# Altium PCB Maketa.PcbDoc
Units mil, origin at the board's own origin, x right, y up, seen from the top; angles counter-clockwise.
Board outline 6000 x 4000 mil, 2 copper layers (Top Layer, Bottom Layer); 20 components, 0 nets, 51 pads, 0 vias.
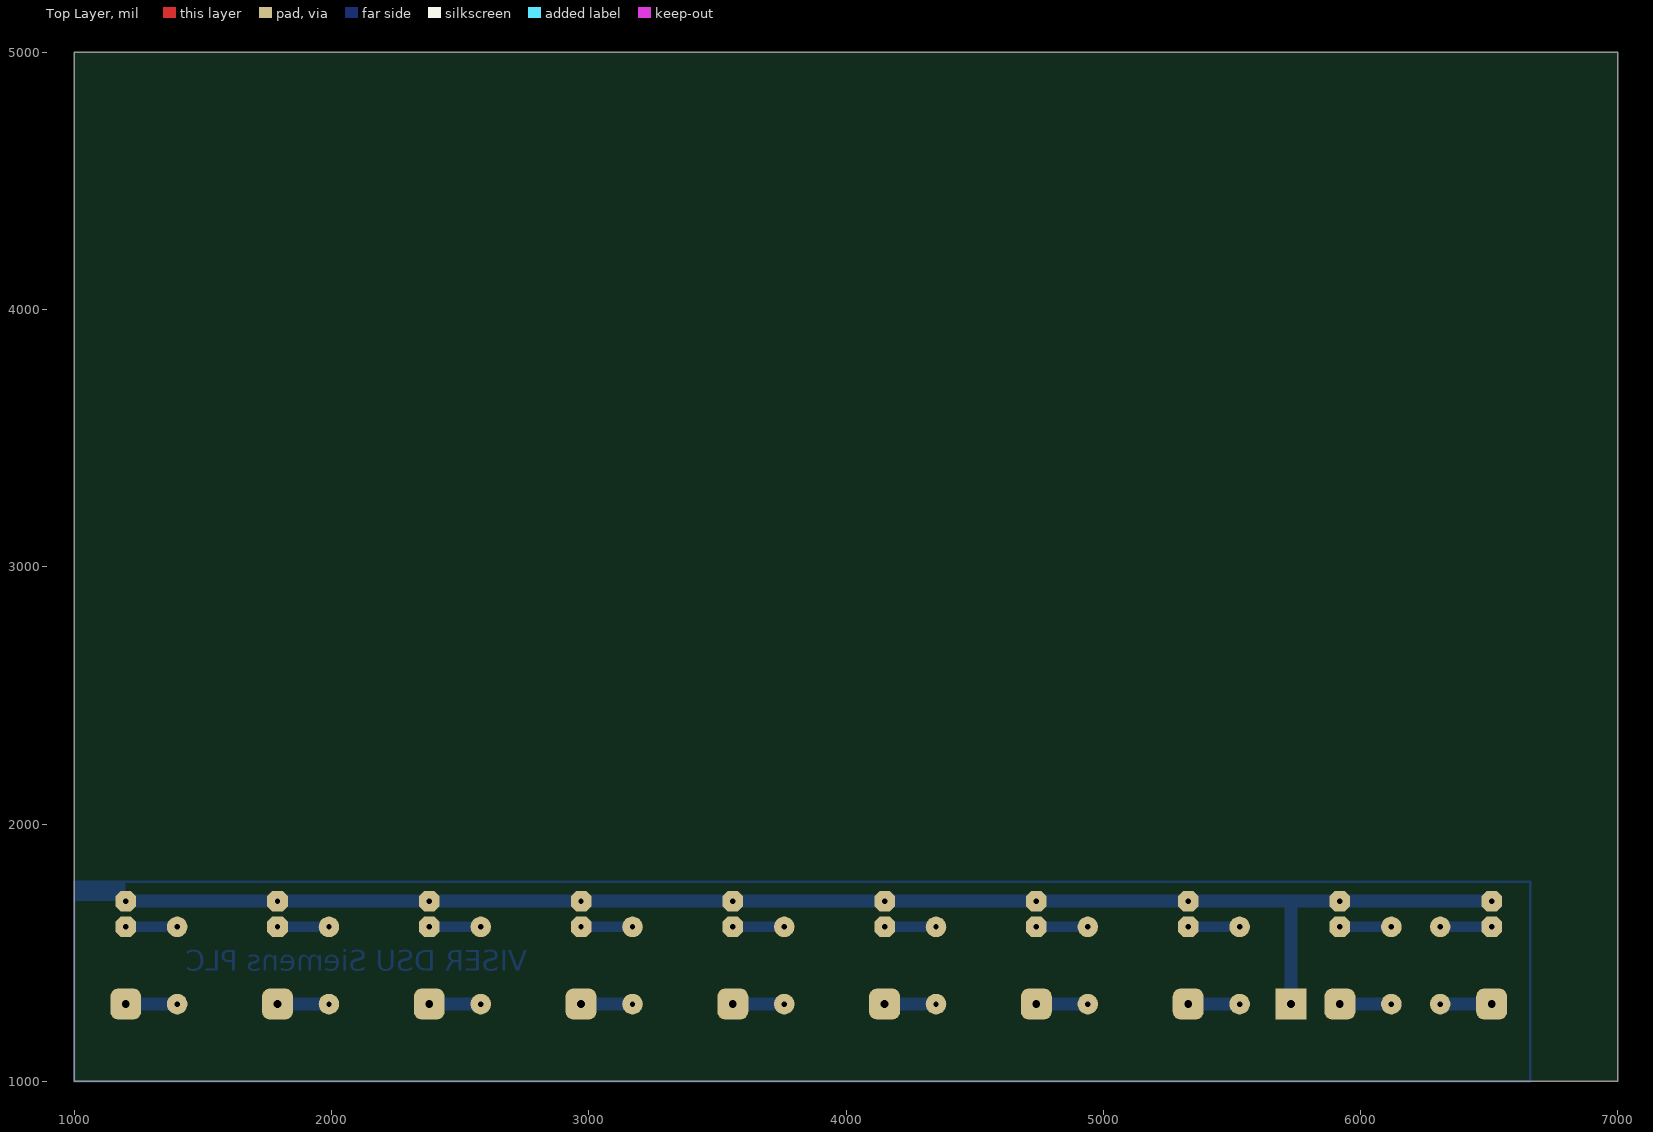
[diagram p0: Top Layer view]
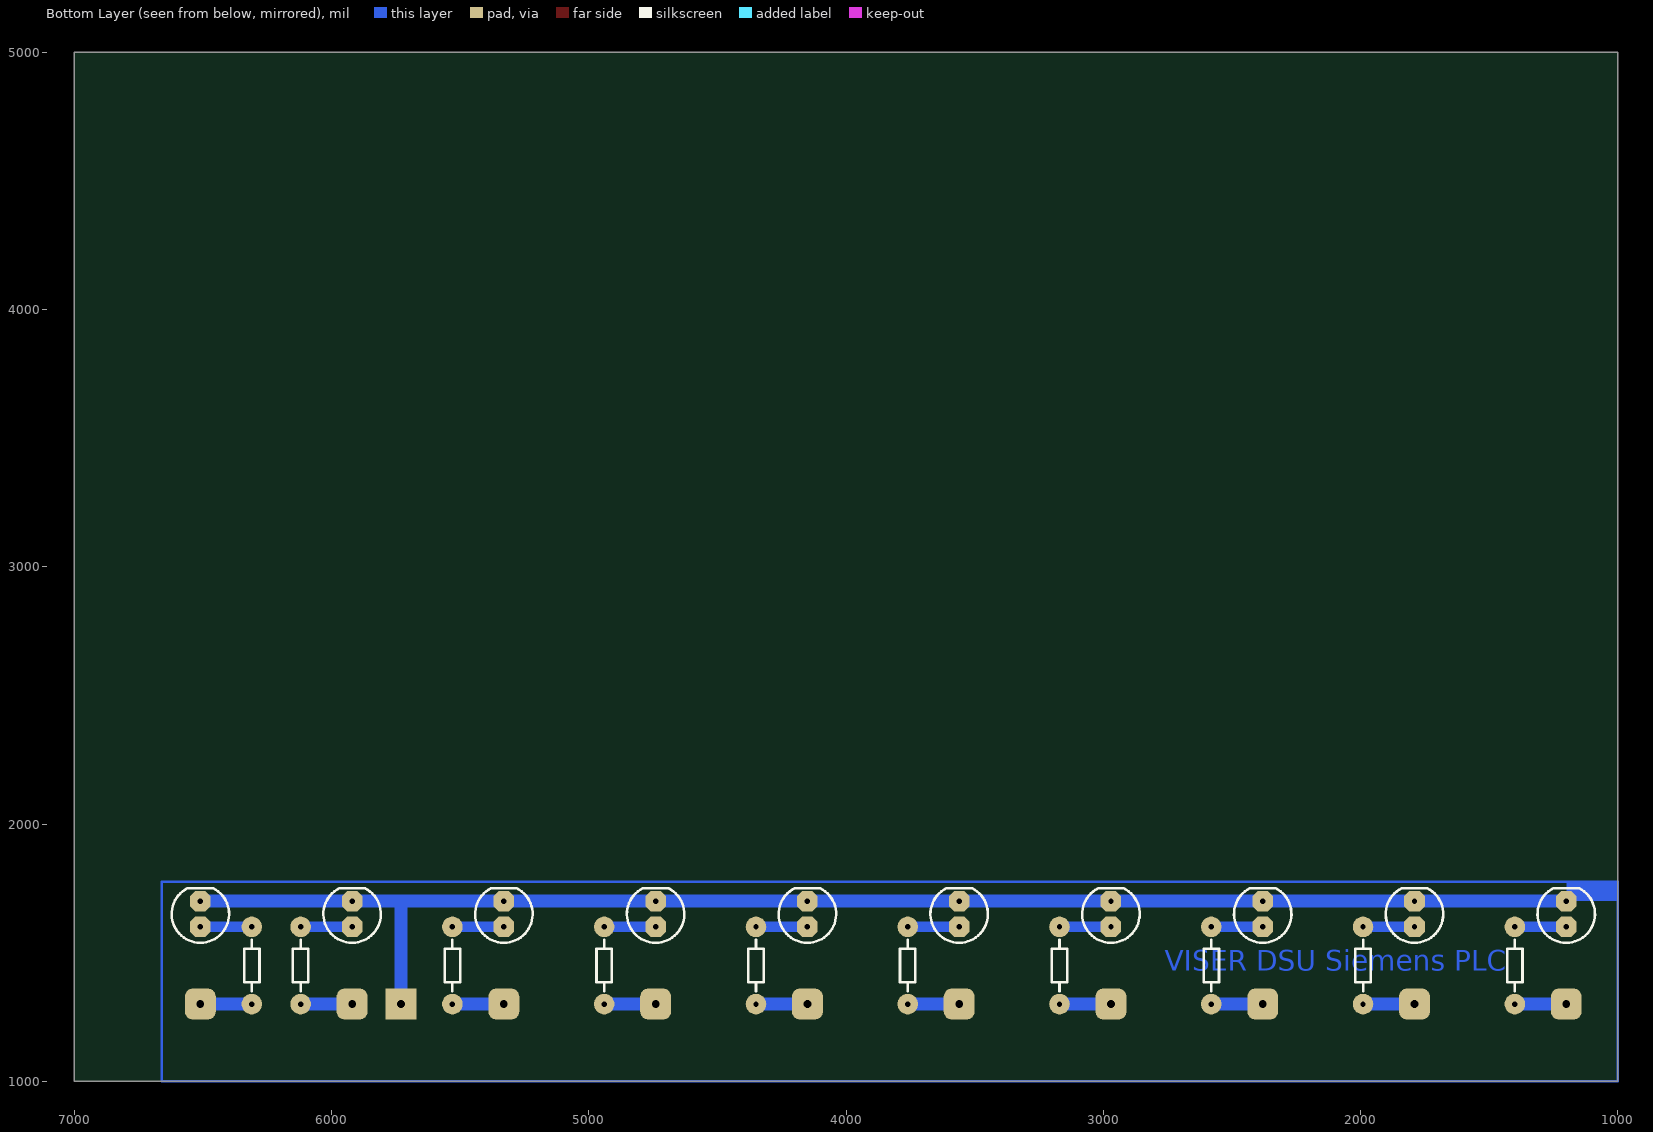
[diagram p1: Bottom Layer view, seen from below]

## Layer stack, top to bottom
Top Solder: solder mask 0.4, Solder Resist, Dk 3.5
Top Layer: signal copper 1.4
Dielectric 1: dielectric 12.6, FR-4, Dk 4.8
Bottom Layer: signal copper 1.4
Bottom Solder: solder mask 0.4, Solder Resist, Dk 3.5

## Board outline
1000,1000 7000,1000 7000,5000 1000,5000

## Design rules (kind name [scope] priority, off if disabled: settings)
Clearance [All] p1: gap=10
PolygonConnect [All] p1: connectstyle=Relief reliefconductorwidth=10 reliefentries=4 polygonreliefangle="90 Angle" airgapwidth=10
RoutingVias [All] p1: holewidth=28 width=50 viastyle="Through Hole" minholewidth=28 minwidth=50 maxholewidth=28 maxwidth=50
SolderMaskExpansion [All] p1: expansion=4
UnpouredPolygon [All] p1: allowunpoured=FALSE
Width [All] p1: maxlimit=10 minlimit=10 preferedwidth=10
29 further rules are at their usual default settings.

## Components (designator, comment, footprint, x,y, rotation, side; value= is the part's Value field where it differs from the comment)
? "Comment" LED 1200,1600 r90 top
? "Comment" LED 1790,1600 r90 bottom
? "Comment" LED 2380,1600 r90 bottom
? "Comment" LED 2970,1600 r90 bottom
? "Comment" LED 3560,1600 r90 bottom
? "Comment" LED 4150,1600 r90 bottom
? "Comment" LED 4740,1600 r90 bottom
? "Comment" LED 5330,1600 r90 bottom
? "Comment" LED 5920,1600 r90 bottom
? "Comment" LED 6510,1600 r90 bottom
? "Comment" r1 1400,1600 r270 bottom
? "Comment" r1 1990,1600 r270 bottom
? "Comment" r1 2580,1600 r270 bottom
? "Comment" r1 3170,1600 r270 bottom
? "Comment" r1 3760,1600 r270 bottom
? "Comment" r1 4350,1600 r270 bottom
? "Comment" r1 4940,1600 r270 bottom
? "Comment" r1 5530,1600 r270 bottom
? "Comment" r1 6120,1600 r270 bottom
? "Comment" r1 6310,1600 r270 bottom

## Footprints (in the part's own frame and the unit in brackets; to place one, negate y for a bottom-side part, rotate by r counter-clockwise, add the part's x,y. Pads: shape width x height; smd on the part's side, far side on the other; paste and mask are expansions set on the pad)
LED [mil]
  oct 80x80 hole 21: A(0,0) K(100,0)
r1 [mil]
  round 80 hole 21: 1(0,0) 2(300,0)
  silkscreen extent 50,-30 250,30

## Free pads (board coordinates)
  rrect50% 120x120 hole 30: 10(1200,1300) 11(1790,1300) 12(2380,1300) 13(2970,1300) 14(3560,1300) 15(4150,1300) 16(4740,1300) 17(5330,1300) 18(5920,1300) 19(6510,1300)
  rect 120x120 hole 30: 20(5730,1300)

## Nets (pads, with @x,y where several pads share a name; then routed paths per layer and width w, separated by ;. In a path a pad name is that pad's centre, name@x,y a point inside that pad or via, vN(x,y) a via of type N, cw(c..) or ccw(c..) an arc to the next point about the centre after c; other vN are vias at no path point)
pads on no net: ?.1 ?.2 ?.A ?.K
copper on no net: | length 22580
  Bottom Layer w10: 1000,1000 1000,1775 6660,1775 6660,1000 1000,1000
  Bottom Layer w40: 1200,1600 1400,1600 ; 1790,1600 1990,1600 ; 2380,1600 2580,1600 ; 2970,1600 3170,1600 ; 3560,1600 3760,1600 ; 4150,1600 4350,1600 ; 4740,1600 4940,1600 ; 5330,1600 5530,1600 ; 5920,1600 6120,1600 ; 6310,1600 6510,1600
  Bottom Layer w50: 1200,1300 1400,1300 ; 1200,1700 6510,1700 ; 1790,1300 1990,1300 ; 2380,1300 2580,1300 ; 2970,1300 3170,1300 ; 3560,1300 3760,1300 ; 4150,1300 4350,1300 ; 4740,1300 4940,1300 ; 5330,1300 5530,1300 ; 5730,1300 5730,1700 ; 5920,1300 6120,1300 ; 6310,1300 6510,1300

## Other copper
Bottom Layer:
  rectangle: 1000,1700 1200,1775
  text "VISER DSU Siemens PLC" at 2760,1430 h80